# Altium PCB uz_per_commissioning_digital.PcbDoc
Units mm, origin at the board's own origin, x right, y up, seen from the top; angles counter-clockwise.
Board outline 75 x 61.72 mm, 2 copper layers (Top Layer, Bottom Layer); 9 components, 64 nets, 192 pads, 17 vias.
Unrouted connection lines stored in the file: 37.
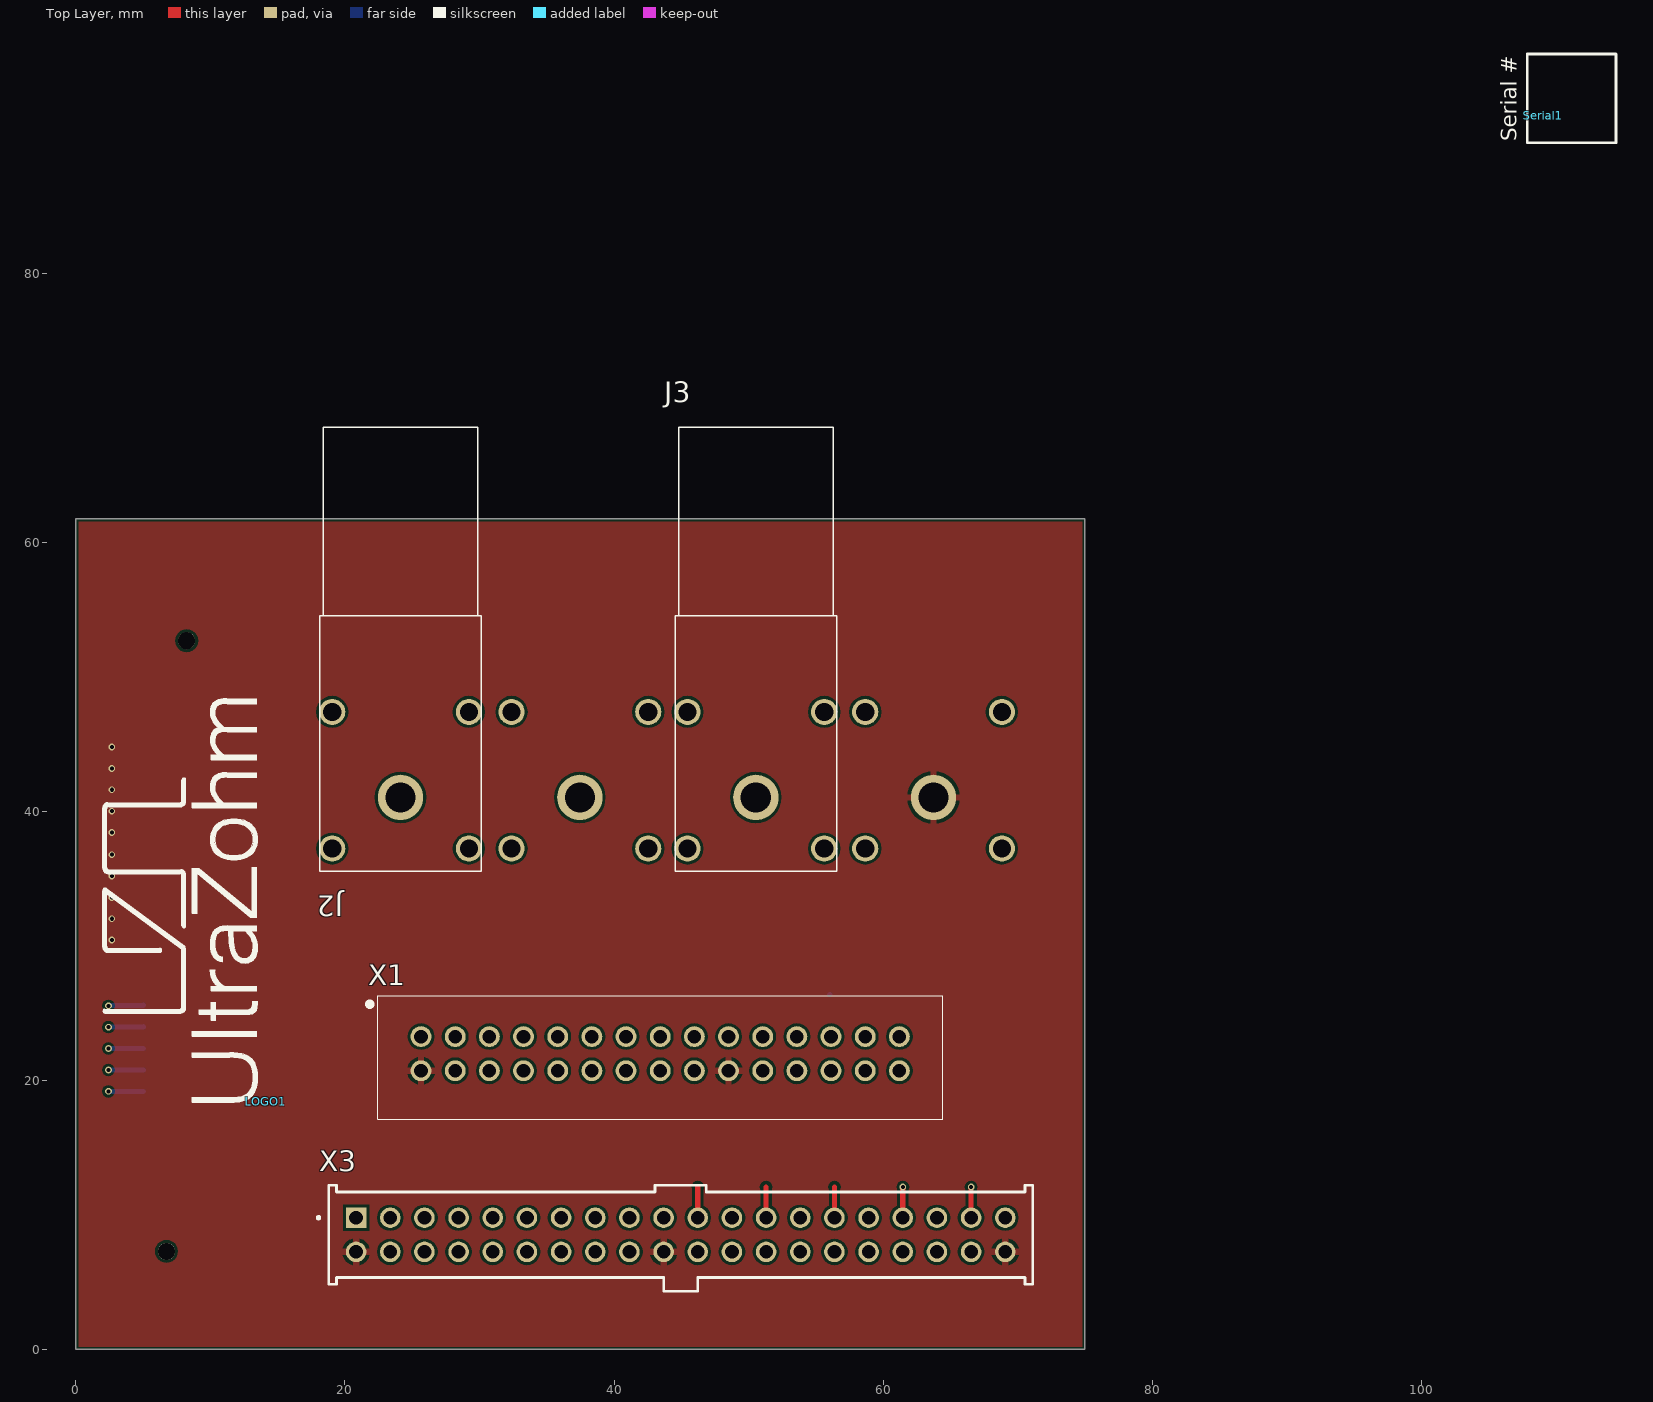
[diagram p0: Top Layer view]
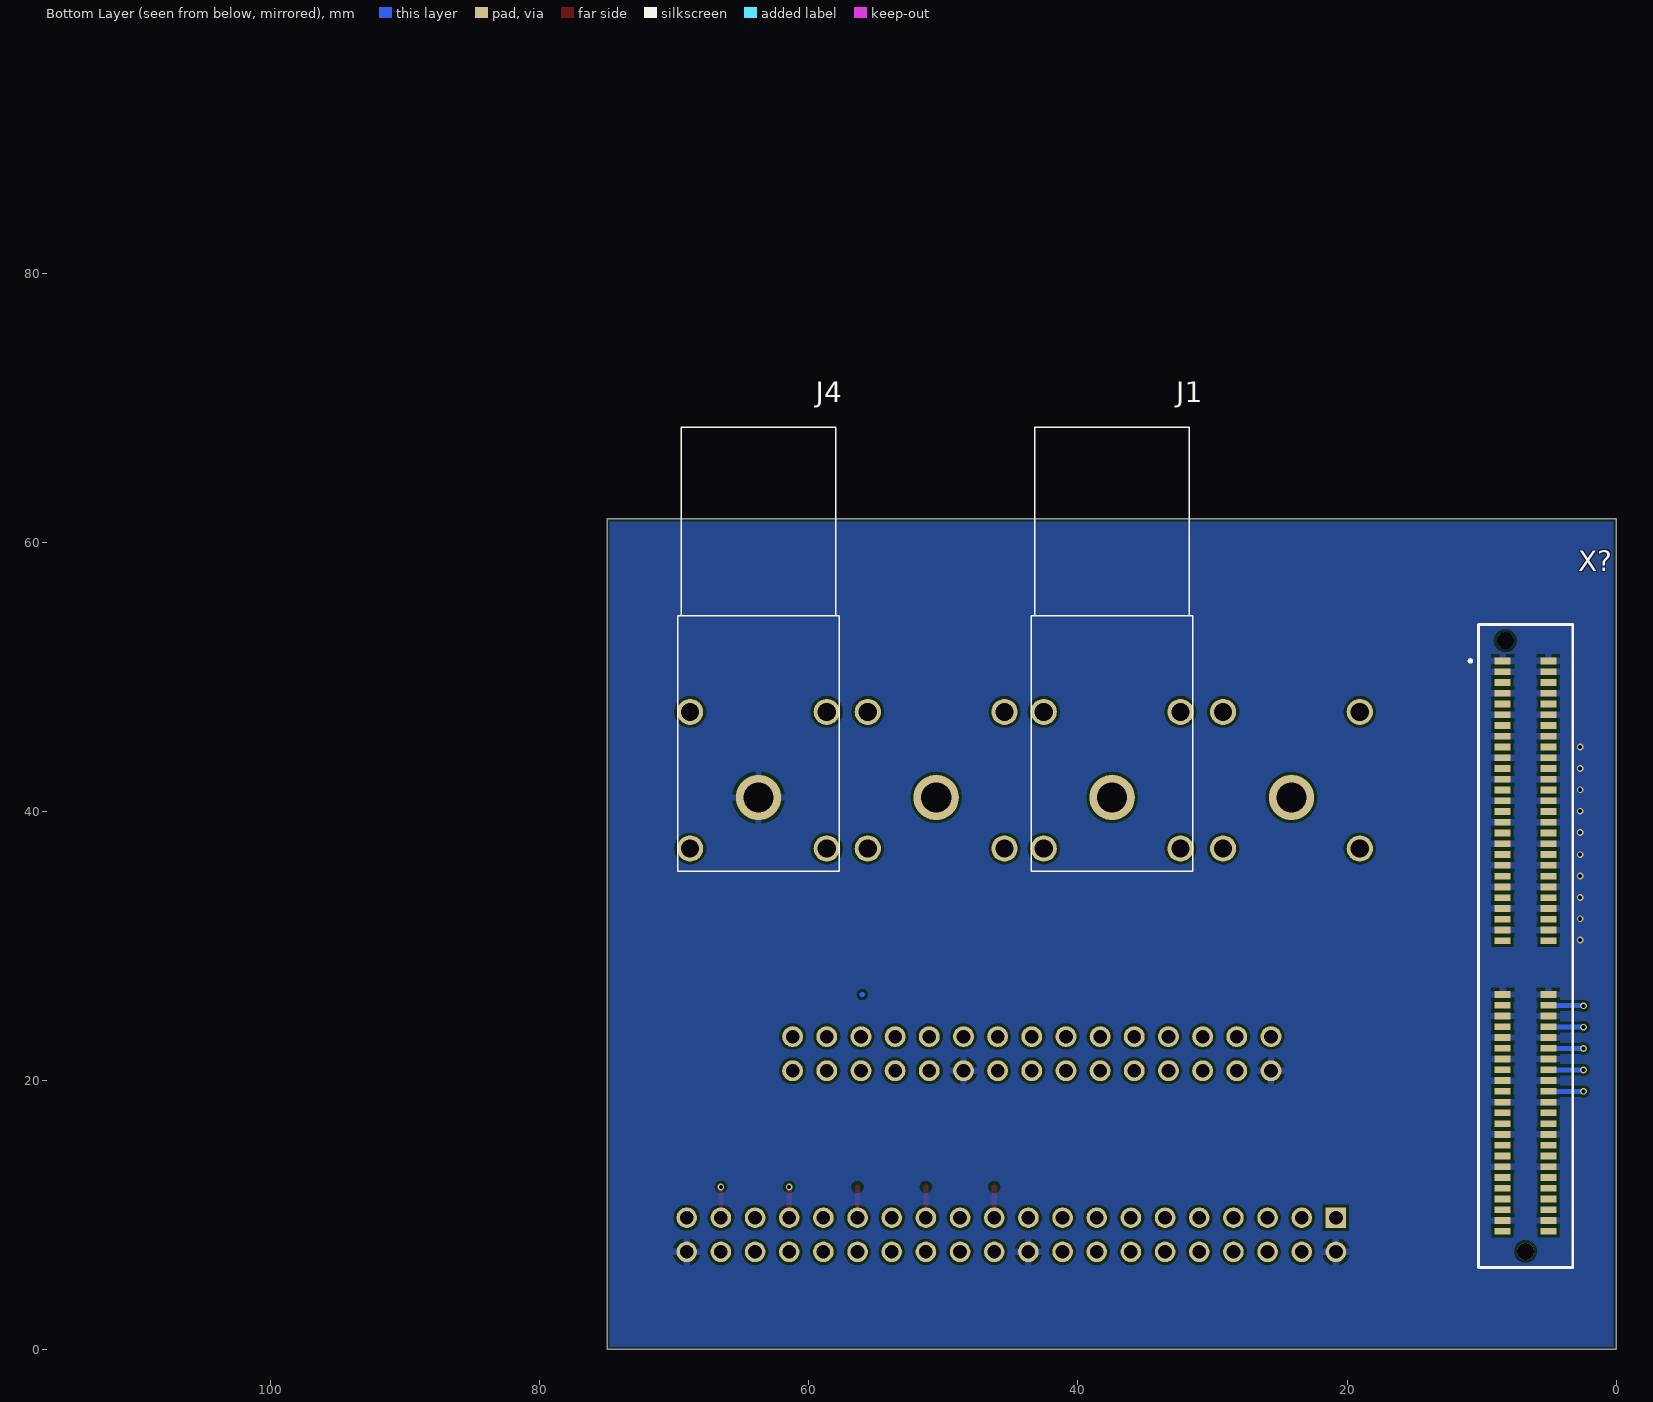
[diagram p1: Bottom Layer view, seen from below]

## Layer stack, top to bottom
Top Solder: solder mask 0.0102, Solder Resist, Dk 3.5
Top Layer: signal copper 0.0356
Dielectric 1: dielectric 0.32, FR-4, Dk 4.8
Bottom Layer: signal copper 0.0356
Bottom Solder: solder mask 0.0102, Solder Resist, Dk 3.5

## Board outline
0,0 75,0 75,61.722 0,61.722

## Design rules (kind name [scope] priority, off if disabled: settings)
BoardOutlineClearance [All] p1: gap=0.2 ignorepadtopadclearanceinfootprint=FALSE except(0.4: Arc-SplitBarrior Arc-SplitContinuation Track-SplitBarrior Track-SplitContinuation SMDPad-SplitBarrior SMDPad-SplitContinuation THPad-SplitBarrior THPad-SplitContinuation Via-SplitBarrior Via-SplitContinuation Fill-SplitBarrior Fill-SplitContinuation Poly-SplitBarrior Poly-SplitContinuation Region-SplitBarrior Region-SplitContinuation Text-SplitBarrior Text-SplitContinuation)
Clearance "Clearance Bottom Layer" [OnLayer('Bottom Layer')] p1: gap=0.203 ignorepadtopadclearanceinfootprint=TRUE except(0.254: Arc-Text Track-Text SMDPad-Text THPad-Text Via-Text Fill-Text Poly-Text Region-Text Text-Text)
Clearance "Clearance Top Layer" [OnLayer('Top Layer')] p2: gap=0.203 ignorepadtopadclearanceinfootprint=TRUE except(0.254: Arc-Text Track-Text SMDPad-Text THPad-Text Via-Text Fill-Text Poly-Text Region-Text Text-Text)
Clearance [All] p3: gap=0.2 ignorepadtopadclearanceinfootprint=FALSE except(0.089: Arc-Arc Arc-Track Arc-SMDPad Track-Track Track-SMDPad SMDPad-SMDPad; 0.127: Arc-Via Track-Via SMDPad-Via THPad-Via Via-Via; 0.254: Arc-Text Track-Text SMDPad-Text THPad-Text Via-Text Fill-Text Poly-Text Region-Text Text-Text)
HoleSize [All] p1: absolutevalues=TRUE maxlimit=6.3 minlimit=0.2 maxpercent=80.000 minpercent=20.000
MinimumAnnularRing [All] p1: minimumring=0.076
MinimumSolderMaskSliver [All] p1: minsoldermaskwidth=0.1
PolygonConnect PolygonConnect_1 [All] p1: thpad.connectstyle=Relief thpad.reliefconductorwidth=0.508 thpad.reliefentries=4 thpad.polygonreliefangle="90 Angle" thpad.airgapwidth=0.254 smdpad.connectstyle=Relief smdpad.reliefconductorwidth=0.508 smdpad.reliefentries=4 smdpad.polygonreliefangle="90 Angle" smdpad.airgapwidth=0.254 via.connectstyle=Direct via.reliefconductorwidth=0.508 via.reliefentries=4 via.polygonreliefangle="90 Angle" via.airgapwidth=0.254
RoutingCorners [All] p1: cornerstyle=Round minsetback=2.54 maxsetback=2.54
RoutingVias [All] p1: holewidth=0.5 width=1 viastyle="Through Hole" minholewidth=0.2 minwidth=0.45 maxholewidth=1 maxwidth=2
SilkToSilkClearance [All] p1: silktosilkclearance=0.1
SilkToSolderMaskClearance [IsPad] p1: minsilkscreentomaskgap=0.1 clearancetoexposedcopper=TRUE
SolderMaskExpansion [All] p1: expansion=0.102 istentingtop=FALSE
Width [All] p1: maxlimit=2.54 minlimit=0.089 preferedwidth=0.381
25 further rules are at their usual default settings.

## Components (designator, comment, footprint, x,y, rotation, side; value= is the part's Value field where it differs from the comment)
J1 "FCR7350R, PCB mount 4mm jack, RED" FCR7350#1 37.465,52 r90 bottom value=3V3
J2 "FCR7350R, PCB mount 4mm jack, RED" FCR7350#1 24.13,52 r90 top value=15V
J3 "FCR7350R, PCB mount 4mm jack, RED" FCR7350#2 50.546,52 r90 top value=24V
J4 "FCR7350B, PCB mount 4mm jack, BLACK" FCR7350#2 63.754,52 r90 bottom value=GND
LOGO1 "UZ Logo" UZ_Logo_small 14.097,18.415 r90 top value=Logo
Serial1 "Serial #" SERIAL 109.093,91.694 r90 top
X1 "IPL1-115-01-L-D-K" IPL1-115-01-YYY-D-K 43.434,21.971 r0 top
X3 "IPL1-120-01-L-D-K" SAMTEC_IPL1-120-01-X-D-K 44.958,8.509 r0 top
X? "HTEC8-150-01-L-DV-A" SAMTEC_HSEC8-150-01-X-DV-A 6.731,29.972 r270 bottom

## Footprints (in the part's own frame and the unit in brackets; to place one, negate y for a bottom-side part, rotate by r counter-clockwise, add the part's x,y. Pads: shape width x height; smd on the part's side, far side on the other; paste and mask are expansions set on the pad)
FCR7350#1 [mil]
  round 76.5 hole 53.15: 1(-581.83,200) 2(-581.83,-200) 3(-181.83,-200) 4(-181.83,200)
  round 132.87 hole 88.58: 5(-432.22,0)
  silkscreen extent -649,-236 652,236, body extent -648,-236 651,236, height 485
FCR7350#2 [mil]
  round 132.87 hole 88.58: 1(-432.22,0)
  round 76.5 hole 53.15: 2(-581.83,200) 3(-581.83,-200) 4(-181.83,-200) 5(-181.83,200)
  silkscreen extent -649,-236 652,236, body extent -648,-236 651,236, height 485
IPL1-115-01-YYY-D-K [mm]
  round 1.55 hole 1.02: 1(-17.78,1.27) 2(-15.24,1.27) 3(-12.7,1.27) 4(-10.16,1.27) 5(-7.62,1.27) 6(-5.08,1.27) 7(-2.54,1.27) 8(0,1.27) 9(2.54,1.27) 10(5.08,1.27) 11(7.62,1.27) 12(10.16,1.27) 13(12.7,1.27) 14(15.24,1.27) 15(17.78,1.27) 16(-17.78,-1.27) 17(-15.24,-1.27) 18(-12.7,-1.27) 19(-10.16,-1.27) 20(-7.62,-1.27) 21(-5.08,-1.27) 22(-2.54,-1.27) 23(0,-1.27) 24(2.54,-1.27) 25(5.08,-1.27) 26(7.62,-1.27) 27(10.16,-1.27) 28(12.7,-1.27) 29(15.24,-1.27) 30(17.78,-1.27)
  silkscreen extent -21.69,-4.85 21.01,4.32, body extent -19.81,-4.19 19.81,3.68, height 8.13
SAMTEC_HSEC8-150-01-X-DV-A [mm]
  rect 0.5x1.2 smd: 01(-21.2,-1.7) 02(-21.2,1.7) 03(-20.4,-1.7) 04(-20.4,1.7) 05(-19.6,-1.7) 06(-19.6,1.7) 07(-18.8,-1.7) 08(-18.8,1.7) 09(-18,-1.7) 10(-18,1.7) 11(-17.2,-1.7) 12(-17.2,1.7) 13(-16.4,-1.7) 14(-16.4,1.7) 15(-15.6,-1.7) 16(-15.6,1.7) 17(-14.8,-1.7) 18(-14.8,1.7) 19(-14,-1.7) 20(-14,1.7) 21(-13.2,-1.7) 22(-13.2,1.7) 23(-12.4,-1.7) 24(-12.4,1.7) 25(-11.6,-1.7) 26(-11.6,1.7) 27(-10.8,-1.7) 28(-10.8,1.7) 29(-10,-1.7) 30(-10,1.7) 31(-9.2,-1.7) 32(-9.2,1.7) 33(-8.4,-1.7) 34(-8.4,1.7) 35(-7.6,-1.7) 36(-7.6,1.7) 37(-6.8,-1.7) 38(-6.8,1.7) 39(-6,-1.7) 40(-6,1.7) 41(-5.2,-1.7) 42(-5.2,1.7) 43(-4.4,-1.7) 44(-4.4,1.7) 45(-3.6,-1.7) 46(-3.6,1.7) 47(-2.8,-1.7) 48(-2.8,1.7) 49(-2,-1.7) 50(-2,1.7) 51(-1.2,-1.7) 52(-1.2,1.7) 53(-0.4,-1.7) 54(-0.4,1.7) 55(3.6,-1.7) 56(3.6,1.7) 57(4.4,-1.7) 58(4.4,1.7) 59(5.2,-1.7) 60(5.2,1.7) 61(6,-1.7) 62(6,1.7) 63(6.8,-1.7) 64(6.8,1.7) 65(7.6,-1.7) 66(7.6,1.7) 67(8.4,-1.7) 68(8.4,1.7) 69(9.2,-1.7) 70(9.2,1.7) 71(10,-1.7) 72(10,1.7) 73(10.8,-1.7) 74(10.8,1.7) 75(11.6,-1.7) 76(11.6,1.7) 77(12.4,-1.7) 78(12.4,1.7) 79(13.2,-1.7) 80(13.2,1.7) 81(14,-1.7) 82(14,1.7) 83(14.8,-1.7) 84(14.8,1.7) 85(15.6,-1.7) 86(15.6,1.7) 87(16.4,-1.7) 88(16.4,1.7) 89(17.2,-1.7) 90(17.2,1.7) 91(18,-1.7) 92(18,1.7) 93(18.8,-1.7) 94(18.8,1.7) 95(19.6,-1.7) 96(19.6,1.7) 97(20.4,-1.7) 98(20.4,1.7) 99(21.2,-1.7) 100(21.2,1.7)
  round 1.27 hole 1.27 unplated: ""(-22.7,-1.5) ""(22.7,0)
  silkscreen extent -23.9,-4.21 23.9,3.5, body extent -23.9,-3.5 23.9,3.5, height 7.9
SAMTEC_IPL1-120-01-X-D-K [mm]
  rect 1.53x1.53 hole 1.02: 1(-24.13,1.27)
  round 1.53 hole 1.02: 2(-21.59,1.27) 3(-19.05,1.27) 4(-16.51,1.27) 5(-13.97,1.27) 6(-11.43,1.27) 7(-8.89,1.27) 8(-6.35,1.27) 9(-3.81,1.27) 10(-1.27,1.27) 11(1.27,1.27) 12(3.81,1.27) 13(6.35,1.27) 14(8.89,1.27) 15(11.43,1.27) 16(13.97,1.27) 17(16.51,1.27) 18(19.05,1.27) 19(21.59,1.27) 20(24.13,1.27) 21(-24.13,-1.27) 22(-21.59,-1.27) 23(-19.05,-1.27) 24(-16.51,-1.27) 25(-13.97,-1.27) 26(-11.43,-1.27) 27(-8.89,-1.27) 28(-6.35,-1.27) 29(-3.81,-1.27) 30(-1.27,-1.27) 31(1.27,-1.27) 32(3.81,-1.27) 33(6.35,-1.27) 34(8.89,-1.27) 35(11.43,-1.27) 36(13.97,-1.27) 37(16.51,-1.27) 38(19.05,-1.27) 39(21.59,-1.27) 40(24.13,-1.27)
  silkscreen extent -27.02,-4.2 26.16,3.67, body extent -26.16,-4.19 26.16,3.68, height 8.13
SERIAL [mm]
  silkscreen extent -2,-5.4 4.6,1.2
UZ_Logo_small [mm] "logo width 3cm"
  silkscreen extent -0.05,0.57 29.94,12.12

## Part data
J1 J2 J3: library part FCR7350R, "FCR7350B, 1000V, 24A, RED", Device Package=THT, Manufacturer=Cliff, Operating Temperature="-40°C - 80°C", Supplier Part Number 1=3185-FCR7350R-ND, Component Type="PCB mount 4mm jack, Red", ComponentLink1Description=datasheet, ComponentLink1URL=https://www.cliffuk.co.uk/products/testleads/sockets/S16NPC.pdf, ComponentLink2Description=drawing, ComponentLink2URL=https://media.digikey.com/pdf/Data%20Sheets/Cliff%20Electronic%20LTD%20PDF's/FCR7350_Drawing.pdf, Created from=DHufnagel, Created On="13.06.2022 10:18:11", Last Updated="28.06.2022 13:58:37", Live Cycle Status=1, Manufacturer Part Number=FCR7350R, Minimum Order=1, Mounting Type=THT, PartID=7, Series=S16N-PC, Stock number="not stored", Supplier 1=Digi-Key, Supplier 2=farnell, Supplier Part Number 2=1854508, Type="PCB mount 4mm jack, Red FCR7350R, 1000V, 24A"
J4: library part FCR7350B, "FCR7350B, 1000V, 24A, BLACK", Device Package=THT, Manufacturer=Cliff, Operating Temperature="-40°C - 80°C", Supplier Part Number 1=3185-FCR7350B-ND, Component Type="PCB mount 4mm jack, Black", ComponentLink1Description=datasheet, ComponentLink1URL=https://www.cliffuk.co.uk/products/testleads/sockets/S16NPC.pdf, ComponentLink2Description=drawing, ComponentLink2URL=https://media.digikey.com/pdf/Data%20Sheets/Cliff%20Electronic%20LTD%20PDF's/FCR7350_Drawing.pdf, Created from=DHufnagel, Created On="13.06.2022 10:18:11", Last Updated="28.06.2022 13:58:37", Live Cycle Status=1, Manufacturer Part Number=FCR7350B, Minimum Order=1, Mounting Type=THT, PartID=6, Series=S16N-PC, Stock number="not stored", Supplier 1=Digi-Key, Supplier 2=farnell, Supplier Part Number 2=1854507, Type="PCB mount 4mm jack, Black	FCR7350B, 1000V, 24A"
LOGO1: library part "Logo small", Manufacturer=UltraZohm, Supplier Part Number 1=-, Component Type=Logo, ComponentLink1Description=https://docs.ultrazohm.com/, ComponentLink1URL=homepage, Created=Jan2021_Liegmann, Created from=MGremer, Created On="03.11.2021 09:04:23", Last Updated="03.11.2021 09:05:50", Live Cycle Status=1, Manufacturer Part Number="Logo small", PartID=10, Supplier 1=-, Type=Logo
Serial1: library part 6, "Field to put in a serial number", Manufacturer="PCB Manufacturer", Manufacturer Part Number="Serial Number", Component Type="Serial Number", Created from="T. Wendt", Created On="02.03.2021 14:31:24", Last Updated="02.03.2021 14:31:24", Live Cycle Status=1, PartID=6, Type="Standard (No BOM)"
X1: "2.54 mm Double Row Terminal Assembly", Device Package=Connector, Manufacturer=SAMTEC, Component Type="Samtec Connector", ComponentLink1Description=Homepage, ComponentLink1URL=https://www.samtec.com/de/products/ipl1, Created from=MGremer, Created On="01.12.2020 18:14:32", Last Updated="15.02.2021 10:08:03", Live Cycle Status=1, Manufacturer Part Number=IPL1-115-01-L-D-K, Mounting Type=THT, Number of positions=30, Number of rows=2, PartID=28, Stock number="not stored", Supplier 1=SAMTEC, Supplier Part Number 1=IPL1-115-01-L-D-K, Type=Connector
X3: "Terminal Assembly, Double Row, Thru-Hole, 2.54 mm x 2.54 mm Pitch, 40 Pins", Device Package=Connector, Manufacturer=SAMTEC, Component Type="Samtec Connector", ComponentLink1Description=Homepage, ComponentLink1URL=https://www.samtec.com/products/ipl1, Created from=PBaumann, Created On="24.03.2021 02:48:34", Last Updated="27.05.2022 12:12:18", Live Cycle Status=1, Manufacturer Part Number=IPL1-120-01-L-D-K, Mounting Type=THT, Number of positions=40, Number of rows=2, PartID=42, Stock number="not stored", Supplier 1=SAMTEC, Supplier Part Number 1=IPL1-120-01-L-D-K, Type=Connector
X?: "0.80 mm Rugged High-Speed Edge Card Connector", Device Package=Connector, Manufacturer=SAMTEC, Package=None, Availability=Unavailable, Component Type="Samtec Connector", ComponentLink1Description=Homepage, ComponentLink1URL=https://www.samtec.com/products/htec8-150-01-l-dv-k, Created from=PBaumann, Created On="05.03.2021 11:38:50", Last Updated="30.11.2022 10:11:19", Live Cycle Status=1, Manufacturer Part Number=HTEC8-150-01-L-DV-A, MF=Samtec, Mounting Type=SMD, MP=HSEC8-150-01-X-DV-A, Number of positions=50, Number of rows=2, PartID=37, Price=None, Stock number="not stored", Supplier 1=SAMTEC, Supplier Part Number 1=HTEC8-150-01-L-DV-A, Type=Connector

## Via types
v1: diameter 0.5, hole 0.3, Top Layer to Bottom Layer, tented both sides, 17 vias

## Nets (pads, with @x,y where several pads share a name; then routed paths per layer and width w, separated by ;. In a path a pad name is that pad's centre, name@x,y a point inside that pad or via, vN(x,y) a via of type N, cw(c..) or ccw(c..) an arc to the next point about the centre after c; other vN are vias at no path point)
3V3: J1.1 X?.13 X?.14
5V: J2.1 X?.09 X?.10
24V: J3.1 X?.05 X?.06
DIG_IO_N0: X1.17
DIG_IO_N1: X1.18
DIG_IO_N2: X1.19
DIG_IO_N3: X1.20
DIG_IO_N4: X1.21
DIG_IO_N5: X1.22
DIG_IO_N6: X1.23
DIG_IO_N7: X1.24
DIG_IO_N8: X1.26
DIG_IO_N9: X1.27
DIG_IO_N10: X1.28
DIG_IO_N11: X1.29
DIG_IO_N12: X1.30
DIG_IO_N13: X3.22
DIG_IO_N14: X3.23
DIG_IO_N15: X3.24
DIG_IO_N16: X3.25
DIG_IO_N17: X3.26
DIG_IO_N18: X3.27
DIG_IO_N19: X3.28
DIG_IO_N20: X3.29
DIG_IO_N21: X3.31
DIG_IO_N22: X3.32
DIG_IO_N23: X3.33
DIG_IO_N24: X3.34
DIG_IO_N25: X3.35
DIG_IO_N26: X3.36
DIG_IO_N27: X3.37
DIG_IO_N28: X3.38
DIG_IO_N29: X3.39
DIG_IO_P0: X1.2 X?.17
DIG_IO_P1: X1.3 X?.18
DIG_IO_P2: X1.4 X?.21
DIG_IO_P3: X1.5 X?.22
DIG_IO_P4: X1.6 X?.25
DIG_IO_P5: X1.7 X?.26
DIG_IO_P6: X1.8 X?.29
DIG_IO_P7: X1.9 X?.30
DIG_IO_P8: X1.11 X?.33
DIG_IO_P9: X1.12 X?.34
DIG_IO_P10: X1.13 X?.37
DIG_IO_P11: X1.14 X?.38
DIG_IO_P12: X1.15 X?.41
DIG_IO_P13: X3.2 X?.42
DIG_IO_P14: X3.3 X?.45
DIG_IO_P15: X3.4 X?.46
DIG_IO_P16: X3.5 X?.49
DIG_IO_P17: X3.6 X?.50
DIG_IO_P18: X3.7 X?.53
DIG_IO_P19: X3.8 X?.54
DIG_IO_P20: X3.9 X?.57
DIG_IO_P21: X3.11 X?.58 | length 4.9
  Top Layer w0.381: X3.11 46.228,12.065
  Bottom Layer w0.381: v1(2.413,25.527) 2.436,25.55 5.009,25.55 X?.58
DIG_IO_P22: X3.12 X?.61
DIG_IO_P23: X3.13 X?.62 | length 4.9
  Top Layer w0.381: X3.13 51.308,12.065
  Bottom Layer w0.381: v1(2.413,23.939) 2.429,23.956 5.015,23.956 X?.62
DIG_IO_P24: X3.14 X?.65
DIG_IO_P25: X3.15 X?.66 | length 4.9
  Top Layer w0.381: X3.15 56.388,12.065
  Bottom Layer w0.381: v1(2.413,22.352) 2.423,22.362 5.021,22.362 X?.66
DIG_IO_P26: X3.16 X?.69 | length 0
  Bottom Layer w0.381: 56.021,26.382 56.021,26.37 56.053,26.37
DIG_IO_P27: X3.17 X?.70 | length 4.9
  Top Layer w0.381: X3.17 v1(61.468,12.065)
  Bottom Layer w0.381: v1(2.413,20.764) 2.417,20.768 5.027,20.768 X?.70
DIG_IO_P28: X3.18 X?.73
DIG_IO_P29: X3.19 X?.74 | length 4.9
  Top Layer w0.381: X3.19 v1(66.548,12.065)
  Bottom Layer w0.381: v1(2.413,19.177) 2.415,19.175 5.028,19.175 X?.74
GND: J4.1 X1.16 X1.25 X3.21 X3.30 X3.40 X?.01 X?.02 X?.03 X?.04 X?.07 X?.08 X?.11 X?.12 X?.15 X?.16 X?.19 X?.20 X?.23 X?.24 X?.27 X?.28 X?.31 X?.32 X?.35 X?.36 X?.39 X?.40 X?.43 X?.44 X?.47 X?.48 X?.51 X?.52 X?.55 X?.56 X?.59 X?.60 X?.63 X?.64 X?.67 X?.68 X?.71 X?.72 X?.75 X?.76 X?.81 X?.82 X?.87 X?.88 X?.97 X?.98
  other v1: 2.667,30.416 2.667,32.004 2.667,33.591 2.667,35.179 2.667,36.767 2.667,38.417 2.667,40.005 2.667,41.593 2.667,43.18 2.667,44.767
pads on no net: J1.2 J1.3 J1.4 J1.5 J2.2 J2.3 J2.4 J2.5 J3.2 J3.3 J3.4 J3.5 J4.2 J4.3 J4.4 J4.5 X1.1 X1.10 X3.1 X3.10 X3.20 X?. X?.77 X?.78 X?.79 X?.80 X?.83 X?.84 X?.85 X?.86 X?.89 X?.90 X?.91 X?.92 X?.93 X?.94 X?.95 X?.96 X?.99 X?.100

## Polygon pours and split planes (outlines as drawn)
GND on Bottom Layer "GND_L02_P000" (solid, pour order 0): 0,103.251 82.042,103.251 82.042,0 0,0
GND on Top Layer "GND_L01_P001" (solid, remove dead copper, pour order 1): 0,103.251 82.042,103.251 82.042,0 0,0

## Silkscreen, mask and mechanical layers (free items; w line width, h text height)
Board Shape:
  the board outline again, w0.254